# EAGLE board Rover (EAGLE 9.5.1)

Size 111.43 x 180.33 mm. Coordinates in mm from the lower left corner, seen from the top.
Outline: 0,0 111.43,0 111.43,180.33 0,180.33 0,0
Copper layers (1*16): Top 0.035mm / dielectric 1.5mm / Bottom 0.035mm
Design rules "default *": minimum track width 12mil, minimum drill 20mil, track to track 12mil, track to pad 12mil, pad to pad 12mil, via to via 12mil, smd to smd 12mil, copper to edge 40mil, drill to drill 12mil, minimum pad ring 10mil, minimum via ring 8mil, stop-mask expansion 4mil, vias tented up to drill 0mil, thermal gap 10mil

## Footprints (pad centres in the part's own frame; a part is rotated, then mirrored left to right if it is on the bottom)
ARDUINO_MEGA_NO_SILK = drill 1.016 pad 1.88: 0 13.97,24.13; 1 11.43,24.13; 2 8.89,24.13; 3 6.35,24.13; 3.3V -13.97,-24.13; 4 3.81,24.13; 5 1.27,24.13; 5V -11.43,-24.13; 5V@1 44.45,24.13; 5V@2 46.99,24.13; 6 -1.27,24.13; 7 -3.81,24.13; 8 -7.62,24.13; 9 -10.16,24.13; 10 -12.7,24.13; 11 -15.24,24.13; 12 -17.78,24.13; 13 -20.32,24.13; 14 19.05,24.13; 15 21.59,24.13; 16 24.13,24.13; 17 26.67,24.13; 18 29.21,24.13; 19 31.75,24.13; 20 34.29,24.13; 21 36.83,24.13; A0 1.27,-24.13; A1 3.81,-24.13; A2 6.35,-24.13; A3 8.89,-24.13; A4 11.43,-24.13; A5 13.97,-24.13; A6 16.51,-24.13; A7 19.05,-24.13; A8 24.13,-24.13; A9 26.67,-24.13; A10 29.21,-24.13; A11 31.75,-24.13; A12 34.29,-24.13; A13 36.83,-24.13; A14 39.37,-24.13; A15 41.91,-24.13; AREF -25.4,24.13; GND -8.89,-24.13; GND@1 -6.35,-24.13; GND@2 44.45,-19.05; GND@3 46.99,-19.05; GND@4 -22.86,24.13; IOREF -19.05,-24.13; NC -21.59,-24.13; RESET -16.51,-24.13; SCL -30.48,24.13; SDA -27.94,24.13; VIN -3.81,-24.13 | drill 1.016 pad 1.88 octagon: 22 44.45,21.59; 23 46.99,21.59; 24 44.45,19.05; 25 46.99,19.05; 26 44.45,16.51; 27 46.99,16.51; 28 44.45,13.97; 29 46.99,13.97; 30 44.45,11.43; 31 46.99,11.43; 32 44.45,8.89; 33 46.99,8.89; 34 44.45,6.35; 35 46.99,6.35; 36 44.45,3.81; 37 46.99,3.81; 38 44.45,1.27; 39 46.99,1.27; 40 44.45,-1.27; 41 46.99,-1.27; 42 44.45,-3.81; 43 46.99,-3.81; 44 44.45,-6.35; 45 46.99,-6.35; 46 44.45,-8.89; 47 46.99,-8.89; 48 44.45,-11.43; 49 46.99,-11.43; 50 44.45,-13.97; 51 46.99,-13.97; 52 44.45,-16.51; 53 46.99,-16.51
CAP-PTH-10MM = drill 0.9 pad 1.651: 1 -5,0; 2 5,0
1X06 = drill 1.016 long: 1 -6.35,0; 2 -3.81,0; 3 -1.27,0; 4 1.27,0; 5 3.81,0; 6 6.35,0
1X04 = drill 1.016 long: 1 -3.81,0; 2 -1.27,0; 3 1.27,0; 4 3.81,0
1X01 = drill 1.016 octagon: 1 0,0
1X08 = drill 1.016 long: 1 -8.89,0; 2 -6.35,0; 3 -3.81,0; 4 -1.27,0; 5 1.27,0; 6 3.81,0; 7 6.35,0; 8 8.89,0
1X05 = drill 1.016 long: 1 -5.08,0; 2 -2.54,0; 3 0,0; 4 2.54,0; 5 5.08,0
LED5MM = drill 0.813 octagon: A -1.27,0; K 1.27,0
1X03 = drill 1.016 pad 1.88: 1 0,0; 2 2.54,0; 3 5.08,0
0207/12 = drill 0.813 octagon: 1 -6.35,0; 2 6.35,0
EG1213 = drill 0.7 pad 1.422: 1 -2,0; 2 0,0; 3 1.9,0 | drill 1.4 pad 2.54: MT1 -4.8,0; MT2 4.8,0
POWERBOOST500 = drill 1.016: 1 10.16,20.32; 2 12.7,20.32; 3 15.24,20.32; 4 17.78,20.32; 5 20.32,20.32; 6 22.86,20.32; 7 25.4,20.32; 8 27.94,20.32 | hole 2.54: 2.54,19.05; 2.54,2.54; 33.02,17.78; 33.02,3.81
1X03' = drill 1.016 long: 1 -2.54,0; 2 0,0; 3 2.54,0
1X02 = drill 1.016 long: 1 -1.27,0; 2 1.27,0

## Placement (x,y rotation side)
B1  ARDUINO_MEGA_R3FULL  [ARDUINO_MEGA_NO_SILK]  39.37,81.28 0 top
C1  10nF  [CAP-PTH-10MM]  35.56,7.62 180 top
FRAME1  FRAME-LETTERNO_PACKAGE  [DUMMY]  -26.67,146.05 0 top  (outside the outline)
FRAME2  FRAME-LETTERNO_PACKAGE  [DUMMY]  -29.21,146.05 0 top  (outside the outline)
FRAME3  FRAME-LETTERNO_PACKAGE  [DUMMY]  -31.75,146.05 0 top  (outside the outline)
JP_9DOFL  [1X06]  72.39,156.21 0 top
JP_9DOFR  [1X04]  72.39,168.91 0 top
JP_HIGH  [1X01]  20.32,2.54 0 top
JP_LOW  [1X01]  40.64,2.54 0 top
JP_MD1L  [1X08]  50.8,138.43 270 top
JP_MD1R  [1X08]  35.56,138.43 90 top
JP_MD2L  [1X08]  40.64,38.1 90 top
JP_MD2R  [1X08]  55.88,38.1 270 top
JP_MLF  [1X06]  6.35,167.64 270 top
JP_MLR  [1X06]  5.08,39.37 90 top
JP_MRF  [1X06]  91.44,166.37 270 top
JP_MRR  [1X06]  95.25,38.1 90 top
JP_SERVO  [1X04]  7.62,140.97 90 top
JP_US  [1X05]  48.26,176.53 0 top
JUMP_12V  [1X01]  54.61,129.54 0 top
JUMP_12V2  [1X01]  36.83,46.99 0 top
LED1  POWERLED  [LED5MM]  85.09,15.24 180 top
LED2  POWERLED  [LED5MM]  20.32,19.05 180 top
M2  SERVO  [1X03]  7.62,139.7 90 top
PI_POWER  [1X04]  7.62,2.54 0 top
R1  0  [0207/12]  59.69,7.62 0 top
R2  0  [0207/12]  76.2,12.7 90 top
R3  47  [0207/12]  62.23,26.67 0 top
R4  10  [0207/12]  80.01,22.86 0 top
R5  0  [0207/12]  73.66,146.05 270 top
R6  0  [0207/12]  76.2,146.05 270 top
R7  680  [0207/12]  11.43,12.7 90 top
R8  22k  [0207/12]  27.94,25.4 270 top
R9  10k  [0207/12]  27.94,40.64 270 top
R10  0  [0207/12]  3.81,12.7 90 top
R11  0  [0207/12]  11.43,68.58 180 top
R12  0  [0207/12]  48.26,67.31 90 top
R13  0  [0207/12]  -25.4,-21.59 0 top  (outside the outline)
R14  0  [0207/12]  86.36,31.75 180 top
R15  0  [0207/12]  86.36,34.29 180 top
R23  0  [0207/12]  16.51,166.37 0 top
R25  0  [0207/12]  58.42,95.25 90 top
R26  0  [0207/12]  60.96,95.25 90 top
R28  0  [0207/12]  8.89,34.29 270 top
R30  0  [0207/12]  50.8,67.31 270 top
R31  0  [0207/12]  63.5,114.3 270 top
R32  0  [0207/12]  66.04,114.3 270 top
R34  0  [0207/12]  43.18,66.04 90 top
R35  0  [0207/12]  43.18,167.64 270 top
R36  0  [0207/12]  53.34,167.64 270 top
R37  0  [0207/12]  64.77,36.83 0 top
R41  0  [0207/12]  38.1,95.25 90 top
R43  0  [0207/12]  85.09,44.45 180 top
R44  0  [0207/12]  17.78,33.02 180 top
R45  0  [0207/12]  17.78,35.56 180 top
R46  0  [0207/12]  16.51,137.16 180 top
R49  0  [0207/12]  16.51,139.7 0 top
R52  0  [0207/12]  48.26,167.64 270 top
R53  0  [0207/12]  50.8,167.64 270 top
S_5V  EG1213  [EG1213]  91.44,13.97 90 top
S_12V  EG1213  [EG1213]  30.48,2.54 0 top
U$1  POWERBOOST500C  [POWERBOOST500]  50.8,-16.51 0 top
XBEE_COMM  [1X03']  85.09,116.84 0 top
XBEE_POWER  [1X02]  93.98,148.59 180 top

## Library data of the parts
B1 = SparkFun-Boards
C1 = SparkFun-Capacitors; PROD_ID: CAP-09321
FRAME1-FRAME3 = SparkFun-Aesthetics; DESIGNER: Lesley Wheat; VERSION: v01
JP_9DOFL JP_9DOFR JP_HIGH JP_LOW JP_MD1L JP_MD1R JP_MD2L JP_MD2R JP_SERVO JP_US JUMP_12V JUMP_12V2 PI_POWER XBEE_COMM XBEE_POWER = pinhead
JP_MLF = pinhead; MOTOR: LEFT_FRONT
JP_MLR = pinhead; MOTOR: LEFT_REAR
JP_MRF = pinhead; MOTOR: RIGHT_FRONT
JP_MRR = pinhead; MOTOR: RIGHT_REAR
LED1 LED2 = led
M2 = SparkFun-Electromechanical
R1-R15 R23 R25 R26 R28 R30-R32 R34-R37 R41 R43-R46 R49 R52 R53 = resistor
S_5V S_12V = adafruit
U$1 = jos-ph

## Nets
3VO: JP_9DOFL.2
5V: JP_9DOFL.1 JP_MD1L.7 JP_MD1R.4 JP_MD2L.7 JP_MD2R.4 JP_MRF.4 JP_MRR.4 JP_SERVO.3 LED1.A M2.2 R10.2 R13.1 R13.2 R23.2 R28.2 R36.2 S_5V.2 XBEE_POWER.1
12V: C1.2 JP_MD2L.8 JUMP_12V2.1 LED2.A R8.2 S_12V.2
AI1: JP_9DOFR.3
AI2: JP_9DOFR.4
BAT_MONITOR_12V: R8.1 R9.2 R30.1
ECHO: B1.9 R52.2
GI1: JP_9DOFR.1
GI2: JP_9DOFR.2
GND: B1.GND B1.GND@1 B1.GND@2 B1.GND@3 B1.GND@4 C1.1 JP_9DOFL.3 JP_LOW.1 JP_MD1L.1 JP_MD1L.6 JP_MD1R.8 JP_MD2L.1 JP_MD2L.6 JP_MD2R.8 JP_MLF.3 JP_MLR.3 JP_MRF.3 JP_MRR.3 JP_SERVO.4 M2.3 PI_POWER.3 PI_POWER.4 R2.2 R3.1 R7.1 R9.1 R35.2 XBEE_POWER.2
LF_ENC: JP_MLF.6 R32.1
LF_PWM: B1.3 JP_MD1R.1
LR_ENC: R11.1 R26.1
LR_PWM: B1.5 JP_MD2R.1
MOP1: B1.10 JP_MD1R.3 JP_MD1R.5 R37.2
MOP2: B1.11 JP_MD1R.2 JP_MD1R.6 JP_MD2R.2 JP_MD2R.6
N$1: B1.IOREF
N$2: R1.2 U$1.3
N$3: B1.RESET
N$4: B1.6 R41.2
N$5: B1.3.3V
N$6: B1.5V B1.5V@1 B1.5V@2
N$7: JP_MRR.1 R14.1
N$8: R2.1 U$1.2 U$1.7
N$9: B1.VIN
N$10: JP_US.1 R35.1
N$11: JP_HIGH.1 S_12V.1
N$12: LED2.K R7.2
N$13: PI_POWER.1 PI_POWER.2 R10.1
N$14: B1.SDA
N$15: B1.A5
N$16: B1.A6
N$17: B1.A7
N$18: B1.A8
N$19: B1.A9
N$20: B1.A10
N$21: B1.A11
N$22: B1.A12
N$23: B1.A13
N$24: B1.A14
N$25: B1.A15
N$26: S_5V.1 U$1.8
N$27: JP_MRR.2 R15.1
N$28: B1.SCL
N$29: JP_MD1L.8 JUMP_12V.1
N$30: JP_MLR.6 R11.2
N$31: JP_MD2R.3 JP_MD2R.5 R37.1
N$32: B1.A3 R12.1
N$35: JP_MLF.4 R23.1
N$36: JP_SERVO.1 R46.2
N$51: JP_SERVO.2 M2.1 R49.1
N$56: B1.14 R25.2
N$57: B1.16 R31.2
N$58: JP_MLR.4 R28.1
N$61: B1.A4 R30.2
N$63: B1.15 R26.2
N$72: B1.17 R32.2
N$73: B1.A1 R34.1
N$74: JP_US.5 R36.1
N$75: B1.AREF
N$77: B1.13
N$78: B1.12
N$84: JP_MRR.6 R43.1
N$85: JP_MD2L.4 R45.1
N$86: JP_MD2L.5 R44.1
N$87: JP_US.3 R52.1
N$88: JP_US.4 R53.1
N$93: B1.20 R6.2
N$94: B1.21 R5.2
N$96: LED1.K R4.2
N$97: R3.2 R4.1
N$98: JP_MLR.1 R44.2
N$102: JP_MLR.2 R45.2
N$103: JP_MD2L.3 R15.2
N$105: JP_MD2L.2 R14.2
N$106: JP_MD1L.5 JP_MLF.1
N$108: JP_MD1L.4 JP_MLF.2
N$109: JP_MD1L.3 JP_MRF.2
N$111: JP_MD1L.2 JP_MRF.1
RF_ENC: JP_MRF.6 R31.1
RF_PWM: B1.4 JP_MD1R.7
RR_ENC: R25.1 R43.2
RR_PWM: JP_MD2R.7 R41.1
RSSI: R12.2 XBEE_COMM.3
RST: JP_9DOFL.6
RX0_ARD: B1.0
RXA: B1.19 XBEE_COMM.2
SCL: JP_9DOFL.4 R5.1
SDA: JP_9DOFL.5 R6.1
SERVO_FEEDBACK: R34.2 R46.1
SERVO_SIG: B1.2 R49.2
TRIG: B1.8 R53.2
TX0_ARD: B1.1
TXA: B1.18 XBEE_COMM.1
V_BATT: B1.A2 R1.1

## Tracks (layer width: path | path; a pad name or v marks a point on that pad's centre or on a via)
5V  (16 unrouted)
12V  (5 unrouted)
BAT_MONITOR_12V  (2 unrouted)
ECHO  (1 unrouted)
GND  (24 unrouted)
LF_ENC  (1 unrouted)
LF_PWM  (1 unrouted)
LR_ENC  (1 unrouted)
LR_PWM  (1 unrouted)
MOP1  (3 unrouted)
MOP2  (4 unrouted)
N$2  (1 unrouted)
N$4  (1 unrouted)
N$6  (2 unrouted)
N$7  (1 unrouted)
N$8  (2 unrouted)
N$10  (1 unrouted)
N$11  (1 unrouted)
N$12  (1 unrouted)
N$13  (2 unrouted)
N$26  (1 unrouted)
N$27  (1 unrouted)
N$29  (1 unrouted)
N$30  (1 unrouted)
N$31  (2 unrouted)
N$32  (1 unrouted)
N$35  (1 unrouted)
N$36  (1 unrouted)
N$51  (1 unrouted)
N$56  (1 unrouted)
N$57  (1 unrouted)
N$58  (1 unrouted)
N$61  (1 unrouted)
N$63  (1 unrouted)
N$72  (1 unrouted)
N$73  (1 unrouted)
N$74  (1 unrouted)
N$84  (1 unrouted)
N$85  (1 unrouted)
N$86  (1 unrouted)
N$87  (1 unrouted)
N$88  (1 unrouted)
N$93  (1 unrouted)
N$94  (1 unrouted)
N$96  (1 unrouted)
N$97  (1 unrouted)
N$98  (1 unrouted)
N$102  (1 unrouted)
N$103  (1 unrouted)
N$105  (1 unrouted)
N$106  (1 unrouted)
N$108  (1 unrouted)
N$109  (1 unrouted)
N$111  (1 unrouted)
RF_ENC  (1 unrouted)
RF_PWM  (1 unrouted)
RR_ENC  (1 unrouted)
RR_PWM  (1 unrouted)
RSSI  (1 unrouted)
RXA  (1 unrouted)
SCL  (1 unrouted)
SDA  (1 unrouted)
SERVO_FEEDBACK  (1 unrouted)
SERVO_SIG  (1 unrouted)
TRIG  (1 unrouted)
TXA  (1 unrouted)
V_BATT  (1 unrouted)
(copper drawn outside any net)
  shapes: Top area x2